# Altium PCB STM_BLUEPILL.PcbDoc
Units mm, origin at the board's own origin, x right, y up, seen from the top; angles counter-clockwise.
Board outline 53.59 x 22.48 mm, 2 copper layers (Top Layer, Bottom Layer); 30 components, 49 nets, 163 pads, 50 vias.
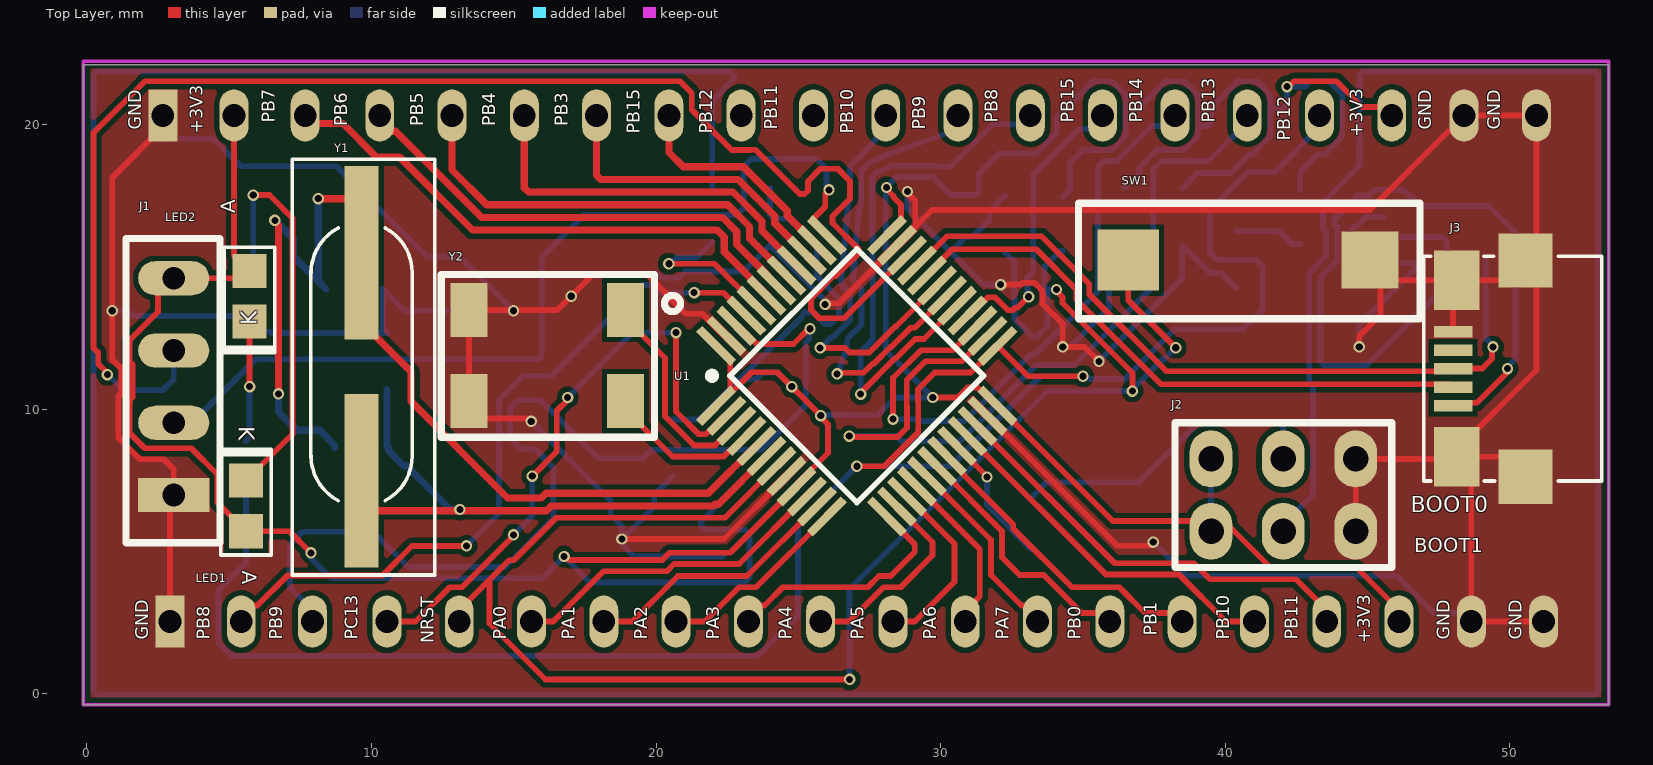
[diagram p0: Top Layer view]
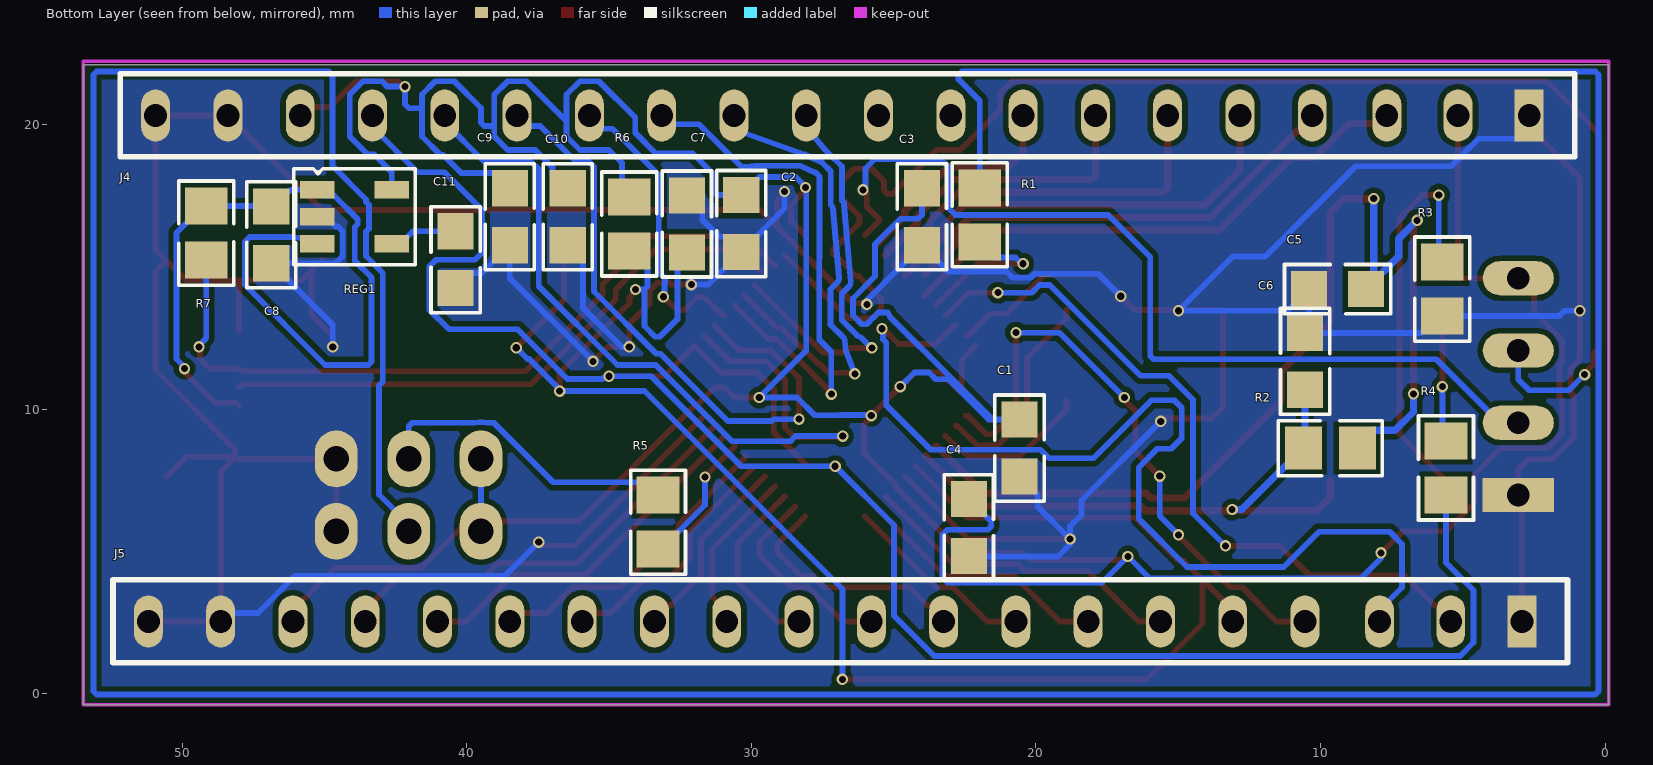
[diagram p1: Bottom Layer view, seen from below]
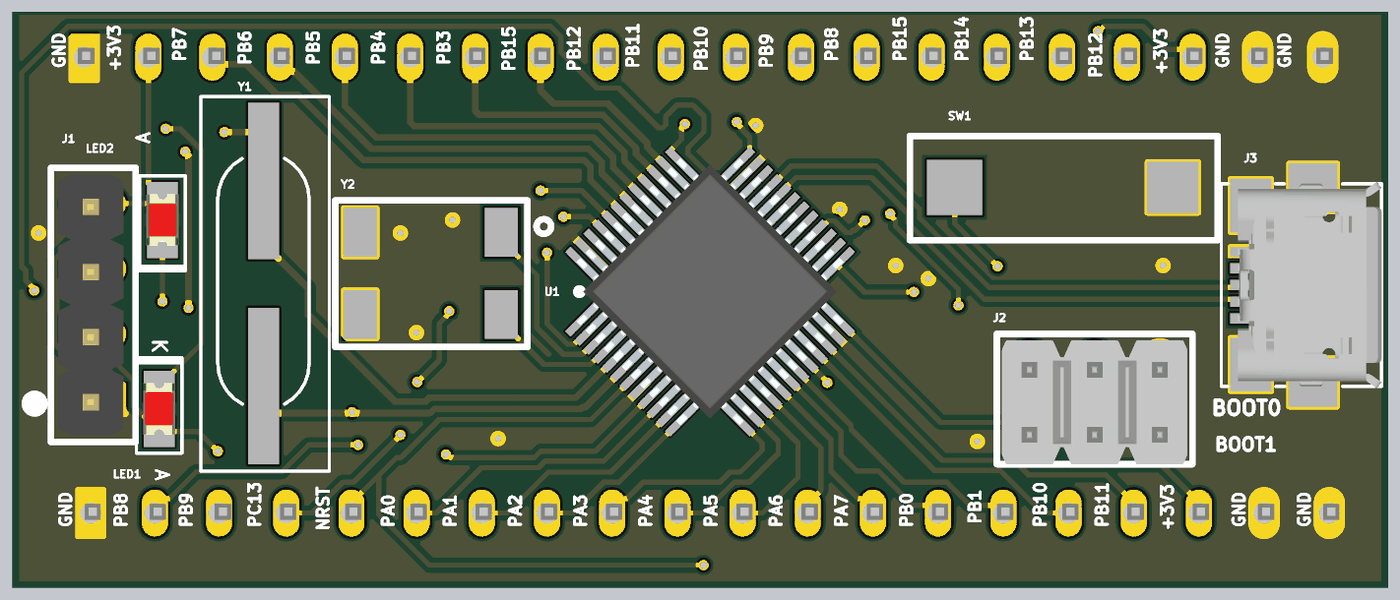
[diagram p2: 3D render of the assembled board from above, using the file's embedded part models]
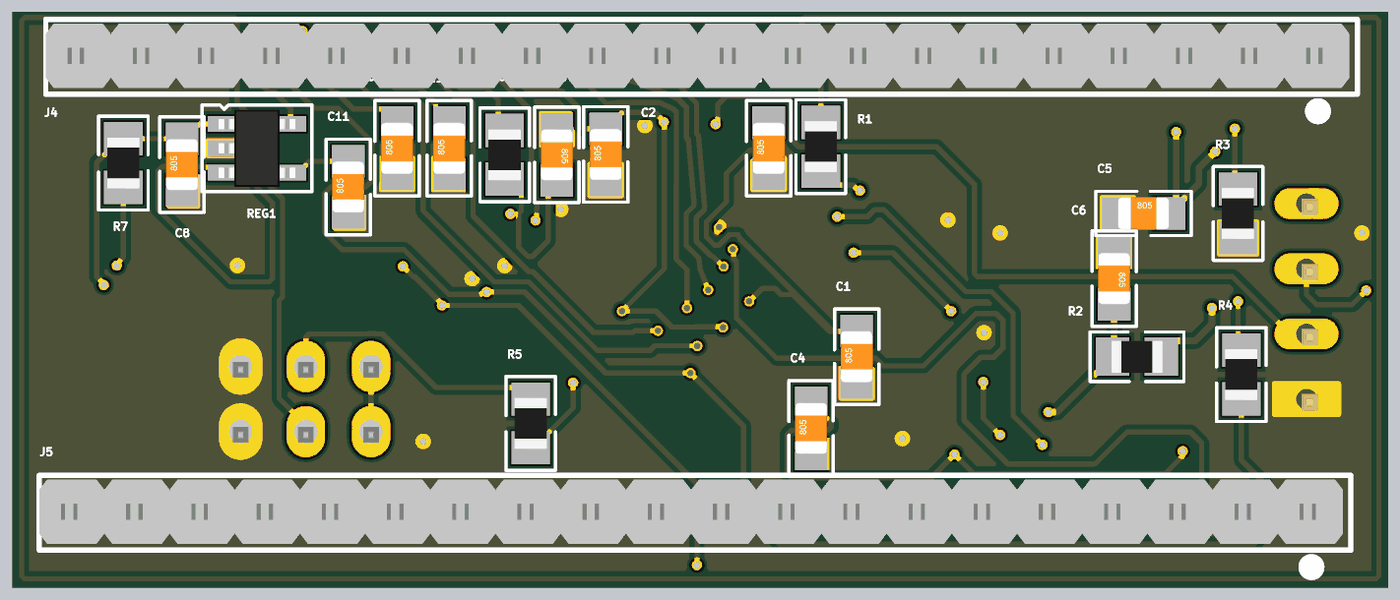
[diagram p3: 3D render of the assembled board from below, using the file's embedded part models]

## Layer stack, top to bottom
Top Solder: solder mask 0.0102, Solder Resist, Dk 3.5
Top Layer: signal copper 0.0356
Dielectric 1: dielectric 0.32, FR-4, Dk 4.8
Bottom Layer: signal copper 0.0356
Bottom Solder: solder mask 0.0102, Solder Resist, Dk 3.5

## Board outline
-0.127,-0.381 53.467,-0.381 53.467,22.098 -0.127,22.098

## Design rules (kind name [scope] priority, off if disabled: settings)
Clearance [All] p1: gap=0.19 ignorepadtopadclearanceinfootprint=FALSE
DiffPairsRouting DiffPairsRouting_2 [InDifferentialPair ('D')] p1: maxlimit=0.254 minlimit=0.254 mostfreqgap=0.254 toplayer_minwidth=0.381 toplayer_maxwidth=0.381 toplayer_prefwidth=0.381 bottomlayer_minwidth=0.381 bottomlayer_maxwidth=0.381 bottomlayer_prefwidth=0.381 maxuncoupledlength=12.7
DiffPairsRouting DiffPairsRouting_1 [InDifferentialPair ('D')] p2: maxlimit=0.254 minlimit=0.254 mostfreqgap=0.254 toplayer_minwidth=0.381 toplayer_maxwidth=0.381 toplayer_prefwidth=0.381 bottomlayer_minwidth=0.381 bottomlayer_maxwidth=0.381 bottomlayer_prefwidth=0.381 maxuncoupledlength=12.7
DiffPairsRouting DiffPair_90DiffPairsRouting [InDifferentialPairClass('diff_90')] p3: maxlimit=0.254 minlimit=0.203 mostfreqgap=0.254 toplayer_minwidth=0.203 toplayer_maxwidth=0.203 toplayer_prefwidth=0.203 bottomlayer_minwidth=0.203 bottomlayer_maxwidth=0.203 bottomlayer_prefwidth=0.203 maxuncoupledlength=12.7
DiffPairsRouting [All] p4: maxlimit=0.254 minlimit=0.254 mostfreqgap=0.254 toplayer_minwidth=0.381 toplayer_maxwidth=0.381 toplayer_prefwidth=0.381 bottomlayer_minwidth=0.381 bottomlayer_maxwidth=0.381 bottomlayer_prefwidth=0.381 maxuncoupledlength=12.7
MatchedLengths MatchedLengths_1 [InDifferentialPair ('D')] p1: tolerance=25.4 checknetsindiffpair=FALSE checkdiffpairvsdiffpair=TRUE checkxsignals=TRUE checkothers=TRUE
MatchedLengths [InDifferentialPair ('D')] p2: tolerance=25.4 checknetsindiffpair=FALSE checkdiffpairvsdiffpair=TRUE checkxsignals=TRUE checkothers=TRUE
MatchedLengths DiffPair_90MatchedLengths [InDifferentialPairClass('diff_90')] p3: tolerance=25.4 checknetsindiffpair=FALSE checkdiffpairvsdiffpair=TRUE checkxsignals=TRUE checkothers=TRUE
MinimumSolderMaskSliver [All] p1: minsoldermaskwidth=0.01
PolygonConnect [All] p1: connectstyle=Direct reliefconductorwidth=0.254 reliefentries=4 polygonreliefangle="90 Angle" airgapwidth=0.254
RoutingVias [All] p1: holewidth=0.45 width=0.9 viastyle="Through Hole" minholewidth=0.25 minwidth=0.4 maxholewidth=0.711 maxwidth=1.27
SilkToSolderMaskClearance [IsPad] p1: minsilkscreentomaskgap=0.01 clearancetoexposedcopper=TRUE
SolderMaskExpansion [All] p1: expansion=0.102 istentingtop=FALSE
Width Width_1 [All] p1: maxlimit=0.254 minlimit=0.2 preferedwidth=0.254
Width [All] p2: maxlimit=0.254 minlimit=0.15 preferedwidth=0.254
27 further rules are at their usual default settings.

## Classes and differential pairs
differential pair class diff_90: D NewDifferentialPair1
component class "[2]- Connector_Page": C8 C9 C10 C11 J3 J4 J5 R7 REG1
component class [1]-Controller_Page: C1 C2 C3 C4 C5 C6 C7 J1 J2 LED1 LED2 R1 R2 R3 R4 R5 R6 U1 Y1 Y2
differential pair NewDifferentialPair1: +D_N -D_P

## Components (designator, comment, footprint, x,y, rotation, side; value= is the part's Value field where it differs from the comment)
C1 "0.1uF" CAP_0805 20.574,8.636 r90 bottom
C2 "0.1uF" CAP_0805 30.353,16.526 r90 bottom
C3 "0.1uF" CAP_0805 24.003,16.764 r90 bottom
C4 "0.1uF" CAP_0805 22.352,5.842 r90 bottom
C5 "22pF" CAP_0805 9.398,14.224 r180 bottom
C6 "22pF" CAP_0805 10.541,11.684 r270 bottom
C7 "0.1uF" CAP_0805 32.258,16.51 r270 bottom
C8 "0.1uF" CAP_0805 46.863,16.129 r90 bottom
C9 "0.1uF" CAP_0805 38.481,16.764 r90 bottom
C10 "1uF" CAP_0805 36.449,16.764 r90 bottom
C11 "22pF" CAP_0805 40.386,15.256 r90 bottom
J1 "4X1 Bergstrip" CON4_100_40D72_TH_ST_MALE 3.048,6.985 r180 top
J2 "2X3 Berg Strip" CON6_100_59D78_TH_ST_Duplicate 39.497,5.715 r0 top
J3 "MICRO USB2.0" CON_10118192-0001LF_SMD 49.276,11.43 r90 top
J4 "20X1 Bergstrip" CON20_100_40D72_TH_ST 2.667,20.32 r270 bottom locked
J5 "20X1 Bergstrip" CON20_100_40D72_TH_ST 2.921,2.54 r270 bottom
LED1 "RED LED" LED_0805 5.588,6.604 r270 top
LED2 "RED LED" LED_0805 5.715,13.97 r90 top
R1 "10K" RES_0805 21.971,16.83 r270 bottom
R2 "10Mohm" RES_0805 9.652,8.636 r180 bottom
R3 "1K" RES_0805 5.715,14.224 r270 bottom
R4 "1K" RES_0805 5.588,7.94 r270 bottom
R5 "10K" RES_0805 33.274,6.035 r270 bottom
R6 "10K" RES_0805 34.29,16.51 r270 bottom
R7 "10K" RES_0805 49.149,16.19 r90 bottom
REG1 "RT9193-33GB" SOT23-5 43.942,16.764 r270 bottom
SW1 "TACT SWITCH" SW_342_SMD 45.085,15.24 r0 top
U1 "STM32F103C8T6" LQFP-48_19.6_393_58X11_SMD 27.051,11.176 r45 top locked
Y1 "8MHz" XTAL_314_240X47_SMD 9.652,15.494 r270 top locked
Y2 "32.768KHz" "XTAL_MC-405 32.7680K-G3" 18.923,10.287 r180 top

## Footprints (in the part's own frame and the unit in brackets; to place one, negate y for a bottom-side part, rotate by r counter-clockwise, add the part's x,y. Pads: shape width x height; smd on the part's side, far side on the other; paste and mask are expansions set on the pad)
CAP_0805 [mm] "Ceramic Capacitor"
  rect 1.27x1.27 smd mask+0.076: 1(-1,0) 2(1,0)
  silkscreen extent -1.86,-0.86 1.86,0.86, body extent -1,-0.62 1,0.63, height 0.78
CON4_100_40D72_TH_ST_MALE [mm] "Berg Strip"
  rect 2.5x1.2 hole 0.8: 1(0,0)
  oval 2.5x1.2 hole 0.8: 2(0,-2.54) 3(0,-5.08) 4(0,-7.62)
  round 1.016 on Top Overlay: ""(2.311,0.178)
  silkscreen extent -1.63,-9.02 1.68,1.68, body extent -1.14,-8.76 1.4,1.4, height 8.55
CON6_100_59D78_TH_ST_Duplicate [mm] "Berg strip"
  oval 1.5x2 hole 0.9: 1(0,0) 2(0,2.54) 3(2.54,0) 4(2.54,2.54) 5(5.08,0) 6(5.08,2.54)
  silkscreen extent -1.27,-1.27 6.35,3.81, body extent -1.07,-1.27 6.15,3.56, height 8.18
CON20_100_40D72_TH_ST [mil] "Berg strip"
  rect 72x40 hole 31.5: 1(0,0)
  oval 72x40 hole 31.5: 2(0,-98.43) 3(0,-196.85) 4(0,-300) 5(0,-400) 6(0,-500) 7(0,-600) 8(0,-700) 9(0,-800) 10(0,-900) 11(0,-1000) 12(0,-1100) 13(0,-1200) 14(0,-1300) 15(0,-1400) 16(0,-1500) 17(0,-1600) 18(0,-1700) 19(0,-1800) 20(0,-1900)
  round 40 on Bottom Overlay: ""(83,2.57)
  silkscreen extent -58,-1949 57,63, body extent -51,-1949 47,51, height 323
CON_10118192-0001LF_SMD [mm] "USB2.0 MICRO"
  rect 0.4x1.35 smd: 1(-1.3,1.275) 2(-0.65,1.275) 3(0,1.275) 4(0.65,1.275) 5(1.3,1.275)
  rect 2.1x1.6 smd: 6(-3.1,1.15) 7(3.1,1.15)
  rect 1.9x1.9 smd: 8(-3.8,-1.275) 9(3.8,-1.275)
  silkscreen extent -3.95,-3.94 3.95,2.3, body extent -4.04,-3.94 4.04,1.66, height 2.81
LED_0805 [mm] "LED"
  rect 1.2x1.2 smd mask+0.076: A(0.889,0) K(-0.889,0)
  silkscreen extent -1.99,-0.89 1.73,0.89, body extent -1.01,-0.62 1.01,0.63, height 1.1
LQFP-48_19.6_393_58X11_SMD [mm] "48LQFP"
  rect 1.7x0.3 smd mask+0.076: 1(-4.238,2.75) 2(-4.238,2.25) 3(-4.238,1.75) 4(-4.238,1.25) 5(-4.238,0.75) 6(-4.238,0.25) 7(-4.238,-0.25) 8(-4.238,-0.75) 9(-4.238,-1.25) 10(-4.238,-1.75) 11(-4.238,-2.25) 12(-4.238,-2.75) 25(4.238,-2.75) 26(4.238,-2.25) 27(4.238,-1.75) 28(4.238,-1.25) 29(4.238,-0.75) 30(4.238,-0.25) 31(4.238,0.25) 32(4.238,0.75) 33(4.238,1.25) 34(4.238,1.75) 35(4.238,2.25) 36(4.238,2.75)
  rect 0.3x1.7 smd mask+0.076: 13(-2.75,-4.238) 14(-2.25,-4.238) 15(-1.75,-4.238) 16(-1.25,-4.238) 17(-0.75,-4.238) 18(-0.25,-4.238) 19(0.25,-4.238) 20(0.75,-4.238) 21(1.25,-4.238) 22(1.75,-4.238) 23(2.25,-4.238) 24(2.75,-4.238) 37(2.75,4.238) 38(2.25,4.238) 39(1.75,4.238) 40(1.25,4.238) 41(0.75,4.238) 42(0.25,4.238) 43(-0.25,4.238) 44(-0.75,4.238) 45(-1.25,4.238) 46(-1.75,4.238) 47(-2.25,4.238) 48(-2.75,4.238)
  silkscreen extent -3.72,-3.15 3.15,3.72, body extent -4.5,-4.5 4.5,4.5, height 1.7
RES_0805 [mm] "Resister"
  rect 1.3x1.5 smd mask+0.076: 1(0.95,0) 2(-0.95,0)
  silkscreen extent -1.83,-0.97 1.83,0.97, body extent -1,-0.63 1,0.62, height 0.5
SOT23-5 [mm] "CASE: SOT"
  rect 0.62x1.22 smd mask+0.076: 1(-0.953,-1.31) 2(-0.003,-1.31) 3(0.947,-1.31) 4(0.952,1.31) 5(-0.953,1.31)
  silkscreen extent -1.69,-2.14 1.69,2.14, body extent -1.5,-1.5 1.5,1.5, height 1.41
SW_342_SMD [mm] "CASE: SMD"
  rect 2x2 smd: 1(0,0)
  rect 2.15x2.15 smd: 2(-8.5,0)
  silkscreen extent -10.25,-2.06 1.75,2, body extent -7.17,-1.79 -1.17,1.71, height 2.4
XTAL_314_240X47_SMD [mm] "CASE: TH"
  rect 6.096x1.2 smd: 1(0,0) 2(8,0)
  silkscreen extent -3.29,-2.44 11.32,2.57, body extent -2.99,-2.27 10.9,2.41, height 3.05
"XTAL_MC-405 32.7680K-G3" [mm] "Crystal"
  rect 1.3x1.9 smd: 1(0,-3.2) 2(5.5,-3.2) 3(5.5,0) 4(0,0)
  silkscreen extent -1.93,-4.44 6.48,1.27, body extent -1.02,-4.44 6.48,1.27, height 3.6

## Part data
C1 C2 C3 C4 C7 C8 C9: library part CAP_0.1uF-50V-5%-0805, "0.1µF ±5% 50V Ceramic Capacitor X7R 0805 (2012 Metric)", Case/Package="0805 (2012 Metric)", Manufacturer=KEMET, Manufacturing Part Number=C0805C104J5RACTU, Supplier Part Number-1=399-1171-1-ND, Supplier-1=Digikey
C5 C6 C11: library part CAP_22pF-50V-5%-0805, "22pF ±5% 50V Ceramic Capacitor C0G, NP0 0805 (2012 Metric)", Case/Package=0805, Manufacturer=KEMET, Manufacturer Part Number=C0805C220J5GACTU, Supplier Part Number-1=399-1113-1-ND, Supplier-1=Digikey
C10: library part CAP_1uF-50V-5%-0805, "1µF ±5% 50V Ceramic Capacitor X7R 0805 (2012 Metric)", Case/Package="0805 (2012 Metric)", Manufacturer=Yageo, Manufacturing Part Number=CC0805JKX7R9BB105, Supplier Part Number-1=311-3498-1-ND, Supplier-1=Digikey
J1: library part CON-BS-PLG_4X1-100-TH-ST, "4 pin, 1 row, 2.54mm pitch bergstrip", Case/Package=TH, Manufacturer=NA, Manufacturing Part Number=NA, Supplier Part Number-1=NA, Supplier-1=NA
J2: library part CON-BS-PLG_2X3-100-TH-ST, "6 pin, 2 row, 2.54mm pitch bergstrip", Case/Package=TH, Manufacturer=NA, Manufacturer Part Number=NA, Supplier Part Number-1=NA, Supplier-1=NA
J3: library part CON-USB_10118192-0002LF-SMD, "USB - micro B USB 2.0 Receptacle Connector 5 Position Surface Mount, Right Angle", Case/Package=SMD, Manufacturer="Amphenol ICC (FCI)", Manufacturing Part Number=10118192-0002LF, Supplier Part Number-1=609-5379-1-ND, Supplier-1=Digikey
J4 J5: library part CON-BS-PLG_20X1-100-TH-ST, "20 pin, 1 row, 2.54mm pitch bergstrip", Case/Package=TH, Manufacturer=NA, Manufacturing Part Number=NA, Supplier Part Number-1=NA, Supplier-1=NA
LED1 LED2: library part LED-RED_10mA-0805, "Red 621nm LED Indication - Discrete 2V 0805 (2012 Metric)", Case/ Package=0805, Manufacturer="Lite-On Inc.", Manufacturer Part Number=LTST-C170EKT, Supplier Part Number-1=160-1178-1-ND, Supplier-1=Digikey
R1 R5 R6 R7: library part RES_10K-0.125W-1%-0805, "10 kOhms ±1% 0.125W, 1/8W Chip Resistor 0805 (2012 Metric) Moisture Resistant Thick Film", Case/Package=0805, Manufacturer=Yageo, Manufacturing Part Number=RC0805FR-0710KL, Supplier Part Number-1=311-10.0KCRCT-ND, Supplier-1=Digikey
R2: library part RES_10MOHM-0.125W-1%-0805, "10 MOhms ±1% 0.125W, 1/8W Chip Resistor 0805 (2012 Metric) Automotive AEC-Q200, High Voltage Thick Film", Case/Package="0805 (2012 Metric)", Manufacturer="Rohm Semiconductor", Manufacturing Part Number=KTR10EZPF1005, Supplier Part Number-1=RHM10.0MAHCT-ND, Supplier-1=Digikey
R3 R4: library part RES_1K-0.125W-1%-0805, "1 kOhms ±1% 0.125W, 1/8W Chip Resistor 0805 (2012 Metric) Moisture Resistant Thick Film", Case/Package=0805, Manufacturer=垈㎵á, Manufacturer Part Number=RC0805FR-071KL, Supplier Part Number-1=311-1.00KCRCT-ND, Supplier-1=Digikey
REG1: library part REG_3.3V-5.5V-0.3A-SOT-23-5, "Linear Voltage Regulator IC 1 Output 300mA SOT-23-5", Case/ Package=SOT-23-5, Manufacturer="Richtek USA Inc.", Supplier Part Number-1=1028-1014-1-ND, Manufacturer Part Number=RT9193-33GB, Supplier-1=Digikey
SW1: library part SW_KSR223GLFG-SMD, "Tactile Switch SPST-NO Top Actuated Surface Mount", Case/Package=SMD, Manufacturer=C&K, Manufacturing Part Number=KSR223GLFG, Supplier Part Number-1=401-1704-1-ND, Supplier-1=Digikey
U1: library part "IC-STM32F103C8T6 _1", "ARM® Cortex®-M3 STM32F1 Microcontroller IC 32-Bit 72MHz 64KB (64K x 8) FLASH", Case/Package=48-LQFP, Manufacturer=STMicroelectronics, Supplier Part Number-1=497-6063-ND, Manufacturer Part Number=STM32F103C8T6, Supplier-1=Digikey
Y1: library part XTAL_8MHZ-LFXTAL030234, "Crystals 8MHz 22pF -20C 70C", Case/Package=SMD, Manufacturer="IQD Frequency Products", Manufacturing Part Number=LFXTAL030234Reel, Supplier Part Number-1=449-LFXTAL030234REEL, Supplier-1=Mouser
Y2: library part "XTAL_32.768KHz-MC-405 32.7680K-G3", "Crystals SMD AT XTL MHZ +/-50PPM 12.5 PF 250 T/R", Case/Package=SMD, Manufacturer=Epson, Manufacturing Part Number="MC-405 32.7680K-G3: ROHS", Supplier Part Number-1=732-MC405327680KG3RS, Supplier-1=Mouser

## Via types
v1: diameter 0.4, hole 0.25, Top Layer to Bottom Layer, 50 vias

## Nets (pads, with @x,y where several pads share a name; then routed paths per layer and width w, separated by ;. In a path a pad name is that pad's centre, name@x,y a point inside that pad or via, vN(x,y) a via of type N, cw(c..) or ccw(c..) an arc to the next point about the centre after c; other vN are vias at no path point)
+3V3: C1.2 C2.2 C3.2 C4.2 C9.2 C10.2 J1.4 J2.1 J2.2 J4.2 J4.18 J5.18 LED1.A LED2.A R6.2 REG1.5 U1.1 U1.9 U1.24 U1.36 U1.48 | length 163.9
  Top Layer w0.203: J4.2 5.167,15.407 LED2.A 5.461,14.605 J1.4 2.96,14.605 2.5,14.145 2.5,13.428 1.506,12.434 1.506,11.683 1.604,11.585 1.604,10.419 1.506,10.321 1.506,9.156 2.029,8.633 3.662,8.633 4.59,7.706 4.59,6.713 LED1.A 7.112,5.715 v1(7.874,4.953) ; v1(16.764,4.826) 16.817,4.826 16.941,4.702 20.214,4.702 20.468,4.956 22.599,4.956 U1.9 24.938,7.364 26.035,8.461 26.035,9.472 25.781,9.726 v1(25.781,9.779) 24.257,11.303 23.357,11.303 U1.1@22.639,10.585 ; U1.1 22.605,10.619 22.605,11.733 U1.48 ; v1(28.092,17.79) 28.092,17.737 28.337,17.491 28.337,17.449 28.598,17.189 28.598,16.612 U1.36 ; v1(29.718,10.414) 30.583,10.414 30.938,10.769 31.279,10.769 31.924,10.124 U1.24 36.041,6.076 39.953,6.076 41.606,4.423 44.624,4.423 46.101,2.946 J5.18 ; v1(42.164,21.336) 42.217,21.336 42.407,21.526 43.902,21.526 44.803,20.625 45.542,20.625 J4.18
  Bottom Layer w0.203: v1(7.874,4.953) 7.874,4.767 8.577,4.064 16.002,4.064 v1(16.764,4.826) 17.674,3.916 23.108,3.916 23.279,4.086 23.279,5.598 23.108,5.769 21.685,5.769 21.566,5.888 21.566,6.056 C4.2 ; C1.2 21.514,9.636 ; C3.2 24.003,16.824 24.137,16.691 24.759,16.691 24.87,16.579 25.649,15.8 25.649,14.674 26.428,13.895 26.428,13.299 26.119,12.99 25.945,12.99 25.711,13.224 25.704,13.224 25.526,13.402 25.205,13.402 25.129,13.251 23.003,11.125 21.582,9.705 21.514,9.636 ; v1(24.765,10.795) 24.266,11.294 23.752,11.294 23.514,11.056 23.071,11.056 21.651,9.636 21.514,9.636 ; v1(25.781,9.779) 25.801,9.799 26.873,9.799 26.879,9.793 27.767,9.793 28.388,10.414 v1(29.718,10.414) 28.067,12.065 28.067,17.765 v1(28.092,17.79) ; v1@28.067,17.79 28.438,18.161 29.718,18.161 29.778,18.101 C2.2 31.212,17.526 31.331,17.645 31.331,18.266 32.055,18.99 33.354,18.99 34.078,19.714 34.078,20.248 35.356,21.526 36.018,21.526 36.487,21.058 36.487,20.117 ; R6.2 34.545,17.715 34.545,18.655 35.005,19.114 36.018,19.114 36.487,19.582 36.487,20.117 ; C10.2 36.983,18.297 36.983,18.504 37.593,19.114 38.558,19.114 39.027,19.582 39.027,19.951 ; C9.2 39.015,18.297 40.189,18.297 40.832,18.94 40.924,18.94 41.567,19.582 41.567,20.574 ; J2.1 J2.2 ; REG1.5 42.632,18.331 43.258,18.957 43.481,18.957 44.107,19.582 44.107,21.058 43.638,21.526 42.976,21.526 42.786,21.336 v1(42.164,21.336) 42.164,20.714 42.024,20.574 41.567,20.574 ; 36.487,20.117 37.896,21.526 38.558,21.526 39.027,21.058 39.027,19.951 ; 39.027,19.951 39.378,19.951 39.497,20.07 39.497,20.587 40.436,21.526 41.098,21.526 41.567,21.058 41.567,20.574
+5V: C8.2 J3.1 R7.1 REG1.1 REG1.3 | length 30
  Top Layer w0.203: J3.1 48.099,10.228 48.836,10.228 49.911,11.303 v1(49.911,11.43)
  Bottom Layer w0.203: REG1.3 45.46,16.025 46.077,16.025 46.107,16.056 47.619,16.056 47.79,15.885 47.79,14.373 44.973,11.557 43.456,11.557 43.337,11.676 43.337,14.628 43.927,15.218 43.927,16.405 43.827,16.505 43.827,16.674 44.661,17.508 45.044,17.508 REG1.1 46.167,17.717 46.221,17.662 46.33,17.662 C8.2 46.874,17.14 R7.1 49.249,17.14 50.191,16.198 50.191,11.763 49.911,11.483 v1(49.911,11.43)
BOOT0: J2.3 R1.2 | length 149
  Bottom Layer w0.203: R1.2 21.971,20.841 22.712,21.583 22.712,21.751 22.593,21.87 0.347,21.87 0.228,21.751 0.228,0.093 0.347,-0.026 52.993,-0.026 53.112,0.093 53.112,21.751 52.993,21.87 44.836,21.87 44.717,21.751 44.717,18.555 43.534,17.372 43.534,17.286 43.434,17.186 43.434,16.342 43.534,16.242 43.534,15.381 42.944,14.791 42.944,10.966 43.079,10.832 43.079,7.007 42.037,5.965 J2.3
BOOT1: J2.4 R5.2 | length 17.2
  Bottom Layer w0.203: R5.2 33.727,7.438 36.957,7.438 39.044,9.525 ; J2.4 42.037,9.406 41.918,9.525 ; 39.044,9.525 39.286,9.525 ; 39.044,9.525 39.286,9.525 ; 39.044,9.525 39.286,9.525 ; 39.286,9.525 cw(c39.497,8.505) 39.708,9.525 ; 39.286,9.525 cw(c39.497,8.505) 39.708,9.525 ; 39.286,9.525 cw(c39.497,8.505) 39.708,9.525 ; 39.286,9.525 cw(c39.497,8.505) 39.708,9.525 ; 39.708,9.525 41.918,9.525 ; 39.708,9.525 41.918,9.525 ; 39.708,9.525 41.918,9.525
D_N: J3.2 U1.32 | length 21.1
  Top Layer w0.203: U1.32 29.517,14.733 30.405,15.621 33.352,15.621 34.761,14.212 34.761,13.855 37.74,10.876 47.905,10.876 J3.2
D_P: J3.3 R7.2 U1.33 | length 26.6
  Top Layer w0.203: U1.33 29.194,15.057 30.216,16.078 33.541,16.078 35.218,14.401 35.218,14.044 37.929,11.334 47.905,11.334 J3.3 49.022,11.43 49.365,11.773 49.365,12.154 v1(49.403,12.192)
  Bottom Layer w0.203: R7.2 49.149,12.499 49.403,12.245 v1(49.403,12.192)
GND: C1.1 C2.1 C3.1 C4.1 C5.1 C6.1 C7.1 C8.1 C9.1 C10.1 C11.1 J1.1 J2.5 J2.6 J3.5 J3.6 J3.7 J3.8 J3.9 J4.1 J4.19 J4.20 J5.1 J5.19 J5.20 R3.1 REG1.2 SW1.1 U1.8 U1.23 U1.35 U1.47 Y2.2 Y2.3 | length 223.4
  Top Layer w0.203: J4.1 2.667,19.914 0.889,18.136 0.889,11.744 1.211,11.422 1.211,10.582 1.113,10.484 1.113,8.993 1.866,8.24 2.698,8.24 3.048,7.89 J1.1 2.921,6.858 J5.1 ; v1(15.613,9.576) 15.509,9.68 13.817,9.68 13.423,10.073 Y2.3 Y2.2 16.523,13.487 17.765,14.729 19.694,14.729 20.361,14.061 20.361,14.023 21.029,13.355 21.621,13.355 22.395,12.582 U1.47 ; v1(18.796,5.444) 22.379,5.444 U1.8 ; v1(25.937,13.687) 25.974,13.725 26.418,13.725 U1.35 28.457,15.768 29.102,16.413 ; v1(28.829,17.653) 28.829,17.6 29.102,17.327 29.102,16.413 ; U1.23 36.202,5.207 37.338,5.207 v1(37.465,5.334) ; v1(32.104,14.382) 32.82,14.382 32.883,14.446 33.291,14.446 33.578,14.158 33.578,13.709 34.284,13.004 v1(34.284,12.192) 35.052,12.192 v1(35.56,11.684) ; J2.5 J2.6 48.051,8.255 J3.6 ; v1(44.704,12.192) 44.704,12.573 45.45,13.319 SW1.1@45.45,14.875 ; SW1.1 SW1.1@45.45,14.875 ; J3.5 48.001,14.405 J3.7 ; J3.8 49.851,8.33 J3.6 ; J5.20 J5.19 48.641,7.815 J3.6 ; 29.102,16.413 29.695,17.006 45.073,17.006 47.825,19.758 48.012,19.758 48.387,20.134 J4.19 J4.20 50.927,15.606 J3.9 ; SW1.1@45.45,14.875 45.795,14.53 J3.7 ; J3.6 48.126,8.58 50.927,11.381 50.927,14.854 J3.9 ; J3.7 49.851,14.53 J3.9
  Bottom Layer w0.203: v1(0.889,13.462) 1.418,13.462 1.606,13.274 R3.1 6.263,12.726 6.441,12.726 6.482,12.684 C6.1 10.398,12.827 C5.1 11.16,13.462 v1(14.986,13.462) 13.081,15.367 11.938,15.367 8.763,18.542 5.408,18.542 4.443,19.507 3.073,19.507 2.667,19.914 J4.1 ; v1(15.613,9.576) 18.393,6.795 18.393,6.289 18.796,5.886 v1(18.796,5.444) ; v1(17.018,13.97) 17.81,14.762 20.036,14.762 20.177,14.621 20.812,14.621 21.029,14.839 23.078,14.839 C3.1 25.899,13.868 25.899,13.725 v1(25.937,13.687) ; C1.1 19.931,6.993 19.931,6.579 v1(18.796,5.444) ; C4.1 22.336,4.826 19.225,4.826 18.796,5.255 v1(18.796,5.444) ; v1(28.829,17.653) 28.829,17.05 C2.1 ; v1(32.104,14.382) 31.497,14.382 C2.1 ; C7.1 31.724,16.976 31.724,16.659 31.125,16.059 30.886,16.059 C2.1 ; v1(34.284,12.192) 34.544,12.192 35.916,13.564 35.916,15.231 C10.1 ; v1(35.56,11.684) 38.481,14.605 C9.1 39.456,14.789 39.853,14.789 C11.1 ; v1(37.465,5.334) 38.648,4.151 46.027,4.151 47.333,2.845 48.336,2.845 J5.19 ; v1(44.704,12.192) 44.704,12.97 C8.1 44.607,15.129 44.35,15.386 44.35,16.247 44.521,16.418 44.604,16.418 44.952,16.767 REG1.2 REG1.2@45.552,16.767
NetC11_2: C11.2 REG1.4 | length 2.4
  Bottom Layer w0.203: C11.2 41.888,16.256 42.332,15.812 REG1.4
NetLED1_K: LED1.K R3.2 | length 14
  Top Layer w0.203: LED1.K 7.223,9.128 7.223,16.714 6.41,17.526 v1(5.842,17.526)
  Bottom Layer w0.203: R3.2 5.842,15.301 v1(5.842,17.526)
NetLED2_K: LED2.K R4.2 | length 4.2
  Top Layer w0.203: v1(5.715,10.795) 5.715,11.562 LED2.K
  Bottom Layer w0.203: R4.2 5.715,9.017 v1(5.715,10.795)
NetR1_1: R1.1 U1.44 | length 5.5
  Top Layer w0.203: v1(20.447,15.113) 22.053,15.113 U1.44
  Bottom Layer w0.203: v1(20.447,15.113) 20.5,15.113 20.719,15.332 21.423,15.332 R1.1
NetR5_1: R5.1 U1.20 | length 4.8
  Top Layer w0.203: U1.20 30.578,8.687 31.623,7.642 v1(31.623,7.62)
  Bottom Layer w0.203: v1(31.623,7.62) 31.623,6.636 33.174,5.085 R5.1
NRST: C7.2 J5.5 R6.1 SW1.2 U1.7 | length 62.6
  Top Layer w0.203: J5.5 13.081,2.946 14.833,4.699 14.999,4.699 16.486,6.185 22.414,6.185 U1.7 ; 14.148,4.013 14.148,2.476 16.116,0.508 v1(26.797,0.508) ; v1(34.067,14.21) 34.067,14.157 34.166,14.059 34.277,13.948 34.277,13.729 36.733,11.273 v1(36.733,10.638) ; SW1.2 36.585,13.834 v1(38.257,12.162)
  Bottom Layer w0.203: v1(26.797,0.508) 26.797,3.683 33.752,10.638 v1(36.733,10.638) ; C7.2 32.595,15.173 32.595,13.166 33.21,12.551 33.379,12.551 33.749,12.921 33.749,14.15 ; v1(34.067,14.21) 34.063,14.206 33.761,14.206 33.641,14.325 33.641,15.012 34.19,15.56 R6.1 ; v1@36.703,10.668 37.798,11.763 37.858,11.763 v1(38.257,12.162)
PA0: J5.6 U1.10 | length 11.5
  Top Layer w0.203: J5.6 16.383,2.54 18.152,4.309 20.377,4.309 20.631,4.563 22.913,4.563 U1.10
PA1: J5.7 U1.11 | length 9.2
  Top Layer w0.203: J5.7 19.164,2.54 20.763,4.139 23.196,4.139 U1.11
PA2: J5.8 U1.12 | length 6.8
  Top Layer w0.203: J5.8 21.704,2.54 22.91,3.746 23.51,3.746 U1.12
PA3: J5.9 U1.13 | length 8.6
  Top Layer w0.203: J5.9 23.241,2.726 23.616,3.102 23.803,3.102 24.447,3.746 27.434,3.746 27.827,4.139 28.241,4.139 29.083,4.981 29.083,5.255 U1.13
PA4: J5.10 U1.14 | length 7.1
  Top Layer w0.203: J5.10 26.784,2.54 27.99,3.746 28.59,3.746 29.711,4.867 29.711,5.334 U1.14
PA5: J5.11 U1.15 | length 6.4
  Top Layer w0.203: J5.11 29.083,2.54 30.48,3.937 30.48,5.272 U1.15
PA6: J5.12 U1.16 | length 5.9
  Top Layer w0.203: U1.16 31.369,5.09 31.369,3.42 30.861,2.912 J5.12
PA7: J5.13 U1.17 | length 6.8
  Top Layer w0.203: U1.17 31.762,5.404 31.762,4.179 32.839,3.102 33.026,3.102 33.401,2.726 J5.13
PA8: J4.13 U1.29 | length 18.9
  Top Layer w0.203: v1(27.186,10.534) 27.186,10.582 28.395,11.791 28.424,11.791 29.104,12.47 29.406,12.47 U1.29
  Bottom Layer w0.203: v1(27.186,10.534) 27.186,12.024 27.608,12.446 27.608,15.31 27.6,15.318 27.6,18.182 27.693,18.275 cw(c27.837,18.131) 27.752,18.316 28.275,18.554 29.881,18.554 30.168,18.512 30.336,18.512 31.839,20.015 32.842,20.015 J4.13
PA9: J4.12 U1.30 | length 16.7
  Top Layer w0.203: v1(26.357,11.243) 26.397,11.283 27.285,11.283 27.602,11.6 27.648,11.6 28.232,12.184 28.261,12.184 28.941,12.864 29.092,12.864 U1.30
  Bottom Layer w0.203: v1(26.357,11.243) 26.681,12.075 26.711,12.403 cw(c26.913,12.384) 26.769,12.528 27.215,12.973 27.215,14.221 26.97,14.465 cw(c27.114,14.609) 26.912,14.627 27.129,17.033 27.135,17.102 27.207,17.174 27.207,18.367 27.515,18.675 28.112,18.947 30.488,19.795 30.607,19.914 J4.12
PA10: J4.11 U1.31 | length 14.4
  Top Layer w0.203: v1(25.761,12.155) 26.636,12.155 26.798,11.993 27.485,11.993 28.399,12.907 28.428,12.907 U1.31
  Bottom Layer w0.203: v1(25.761,12.155) 25.961,12.34 26.018,12.397 26.137,12.516 26.282,12.597 26.361,12.676 26.821,13.136 26.821,14.058 26.558,14.321 ; 26.558,14.321 cw(c26.702,14.465) 26.518,14.379 26.499,14.484 26.736,17.196 26.742,17.265 26.814,17.337 26.814,18.53 27.293,19.009 27.412,19.128 28.067,19.914 J4.11
PA11: J4.10
PA12: J4.9
PA15: J4.8 U1.38 | length 7.9
  Top Layer w0.254: J4.8 20.447,19.025 20.953,18.519 23.064,18.519 24.61,16.973 24.61,16.799 U1.38
PB0: J5.14 U1.18 | length 8.9
  Top Layer w0.203: U1.18 32.155,5.718 32.155,4.802 32.778,4.179 33.619,4.179 34.953,2.845 35.636,2.845 J5.14
PB1: J5.15 U1.19 | length 10.8
  Top Layer w0.203: U1.19 30.224,8.288 30.797,7.716 30.797,7.701 32.549,5.949 32.549,5.805 34.608,3.746 36.272,3.746 37.173,2.845 38.176,2.845 J5.15
PB3: J4.7 U1.39 | length 10.8
  Top Layer w0.254: J4.7 17.907,18.223 18.056,18.075 22.88,18.075 24.166,16.789 24.166,16.536 U1.39
PB4: J4.6 U1.40 | length 13.4
  Top Layer w0.254: J4.6 15.367,17.779 15.516,17.631 22.696,17.631 23.722,16.605 23.722,16.273 U1.40
PB5: J4.5 U1.41 | length 15.4
  Top Layer w0.254: J4.5 12.827,18.408 14.048,17.187 22.512,17.187 23.278,16.421 23.278,16.01 U1.41
PB6: J4.4 U1.42 | length 16.3
  Top Layer w0.254: J4.4 10.287,20.12 10.639,19.768 10.839,19.768 13.864,16.743 22.328,16.743 22.834,16.237 22.834,15.794 U1.42@23.886,14.742
PB7: J4.3 U1.43 | length 21.3
  Top Layer w0.254: J4.3 7.946,20.041 8.993,20.041 10.175,18.859 10.986,18.859 13.546,16.299 22.144,16.299 22.39,16.053 22.39,15.53 ; 22.39,15.53 23.913,14.007 22.39,15.53
PB8: J5.2 U1.45 | length 25.5
  Top Layer w0.203: J5.2 5.421,2.726 5.796,3.102 5.983,3.102 7.035,4.154 10.373,4.154 11.417,5.199 v1(13.335,5.199) ; v1(21.336,14.097) 22.362,14.097 U1.45
  Bottom Layer w0.203: v1(13.335,5.199) 14.478,6.342 14.478,10.335 15.319,11.176 16.318,11.176 19.511,14.369 19.873,14.369 20.145,14.097 v1(21.336,14.097)
PB9: J5.3 U1.46 | length 36.4
  Top Layer w0.203: U1.46 22.885,12.935 23.531,12.29 24.823,12.29 25.363,12.831 v1(25.404,12.831)
  Bottom Layer w0.203: J5.3 7.921,2.946 7.132,3.735 7.132,5.26 7.567,5.695 10.054,5.695 11.291,4.457 14.691,4.457 16.387,6.153 16.387,7.956 15.731,8.612 15.238,8.612 14.871,8.979 14.871,10.053 15.135,10.317 15.939,10.317 17.974,8.282 19.538,8.282 19.837,8.581 23.694,8.581 25.257,10.144 25.257,12.346 25.369,12.458 25.369,12.795 v1(25.404,12.831)
PB10: J5.16 U1.21 | length 12.8
  Top Layer w0.203: U1.21 35.796,4.199 38.359,4.199 40.018,2.54 J5.16
PB11: J5.17 U1.22 | length 15.4
  Top Layer w0.203: U1.22 36.109,4.592 38.897,4.592 39.459,4.03 42.477,4.03 43.561,2.946 J5.17
PB12: J4.17 R4.1 U1.25 | length 71
  Top Layer w0.203: v1(27.051,8) 27.053,8.001 28.016,8.001 29.206,9.191 29.206,10.269 29.198,10.277 29.198,10.704 29.785,11.291 31.055,11.291 U1.25 33.061,11.16 v1(34.997,11.16)
  Bottom Layer w0.203: R4.1 5.588,4.605 4.621,3.639 4.621,1.802 5.09,1.334 23.572,1.334 24.981,2.743 24.981,5.931 27.05,8 v1(27.051,8) ; v1@27.053,8 30.352,8 33.516,11.164 34.993,11.164 v1(34.997,11.16) ; v1@35.064,11.164 35.064,11.146 35.088,11.122 35.173,11.122 35.229,11.065 36.465,11.065 38.211,12.811 40.623,12.811 41.313,13.5 41.313,15.012 41.068,15.256 39.704,15.256 39.459,15.5 39.459,17.012 40.778,18.33 41.723,18.33 43.307,19.914 J4.17
PB13: J4.16 U1.26 | length 28.7
  Top Layer w0.203: v1(26.786,9.057) 26.814,9.029 28.488,9.029 28.813,9.354 28.813,10.106 28.805,10.114 28.805,11.025 29.464,11.684 30.741,11.684 U1.26
  Bottom Layer w0.203: v1(26.786,9.057) 26.791,9.062 28.441,9.062 28.623,8.88 30.676,8.88 33.353,11.557 34.702,11.557 37.465,14.32 37.465,18.43 37.755,18.721 39.404,18.721 40.767,20.083 J4.16
PB14: J4.15 U1.27 | length 22.1
  Top Layer w0.203: v1(28.321,9.652) 28.321,11.097 29.301,12.077 30.427,12.077 U1.27
  Bottom Layer w0.203: v1(28.321,9.652) 29.217,9.652 29.284,9.585 30.824,9.585 33.19,11.95 33.334,11.95 35.523,14.138 35.523,18.52 35.723,18.721 36.181,18.721 37.414,19.954 37.861,19.954 J4.15
PB15: J4.14 U1.28 | length 10.6
  Top Layer w0.203: U1.28 31,13.289 31.572,13.861 31.586,13.861 31.659,13.934 31.901,13.934 32.358,13.477 32.527,13.477 32.615,13.565 32.696,13.565 33.084,13.954 v1(33.087,13.954)
  Bottom Layer w0.203: v1(33.087,13.954) 33.049,13.992 33.049,14.416 33.032,14.433 33.032,14.602 33.248,14.818 33.248,18.231 34.874,19.857 35.312,19.857 35.687,20.232 J4.14
PC13: J5.4 U1.2 | length 21.2
  Top Layer w0.203: J5.4 11.544,2.54 12.75,3.746 13.177,3.746 14.986,5.555 v1(14.986,5.588) ; v1(15.645,7.649) 16.51,8.514 16.51,9.947 16.891,10.328 v1(16.891,10.414) ; v1(20.697,12.692) 20.701,12.688 20.701,9.918 21.494,9.125 21.75,9.125 22.395,9.77 U1.2
  Bottom Layer w0.203: v1(14.986,5.588) 15.645,6.247 v1(15.645,7.649) ; v1(16.891,10.414) 19.169,12.692 v1(20.697,12.692)
SWCLK: J1.2 U1.37 | length 32.6
  Top Layer w0.203: U1.37 25.504,16.612 25.504,16.681 25.902,17.079 25.939,17.116 25.939,17.574 v1(26.072,17.707)
  Bottom Layer w0.203: J1.2 3.698,9.525 5.93,11.757 15.862,11.757 15.981,11.876 15.981,15.346 17.457,16.822 21.1,16.822 22.825,16.822 23.077,17.073 23.077,18.52 23.353,18.796 25.654,18.796 25.988,18.462 25.988,17.792 v1(26.072,17.707)
SWDIO: J1.3 U1.34 | length 52.8
  Top Layer w0.203: v1(0.72,11.218) 0.72,11.272 0.397,11.594 0.397,11.986 0.228,12.155 0.228,19.716 1.83,21.318 2.038,21.526 20.836,21.526 21.247,21.115 21.247,20.523 22.656,19.114 23.318,19.114 23.321,19.117 23.489,19.117 25.043,17.563 25.211,17.563 25.331,17.682 25.331,18.015 25.765,18.449 26.379,18.449 26.814,18.015 26.814,17.4 26.193,16.779 26.193,16.548 27.104,15.636 27.104,15.468 26.316,14.679 26.233,14.679 25.445,13.891 25.445,13.484 25.733,13.196 26.596,13.196 U1.34
  Bottom Layer w0.203: v1(0.72,11.218) 1.27,10.668 2.667,10.668 3.048,11.049 J1.3
XTALA: C5.2 R2.1 U1.5 Y1.1 | length 39.2
  Top Layer w0.254: v1(6.604,16.637) 6.604,16.597 6.731,16.47 v1(6.731,10.541) ; v1(8.128,17.399) 9.179,17.399 9.652,16.926 Y1.1 9.652,13.046 11.383,11.315 11.383,10.278 14.78,6.882 15.963,6.882 16.129,7.048 21.83,7.048 23.491,8.71 U1.5
  Bottom Layer w0.254: v1(6.604,16.637) 7.247,15.994 7.247,15.375 C5.2 8.128,14.494 v1(8.128,17.399) ; v1(6.731,10.541) 6.731,9.906 7.378,9.259 8.179,9.259 8.702,8.736 R2.1
XTALB: C6.2 R2.2 U1.6 Y1.2 | length 21.3
  Top Layer w0.254: Y1.2 9.652,6.911 10.125,6.438 16.147,6.438 16.213,6.504 16.313,6.604 22.014,6.604 22.075,6.666 22.187,6.666 U1.6
  Bottom Layer w0.254: C6.2 10.541,8.697 R2.2 10.602,8.536 11.125,8.013 11.225,8.013 12.761,6.477 v1(13.103,6.477)
XTALC: U1.3 Y2.1 | length 7.5
  Top Layer w0.203: Y2.1 18.923,13.187 20.308,11.802 20.308,9.755 21.331,8.732 22.049,8.732 22.064,8.732 22.748,9.417 U1.3
XTALD: U1.4 Y2.4 | length 5.5
  Top Layer w0.203: Y2.4 18.923,9.987 20.571,8.339 22.378,8.339 22.607,8.568 22.675,8.568 U1.4
pads on no net: J1. J3.4 J4. J5.

## Polygon pours and split planes (outlines as drawn)
GND on Bottom Layer "GND_L02_P003" (solid, remove dead copper, pour order 3): 0.228,21.751 0.228,0.093 53.112,0.093 53.112,21.751 52.993,21.87
GND on Top Layer "GND_L01_P000" (solid, remove dead copper, pour order 0): 0,22.098 -0.127,21.971 -0.127,-0.254 53.34,-0.254 53.467,-0.127 53.213,0.127 53.213,21.971

## Keep-outs
Keep-Out Layer:
  lines w0.127: -0.127,-0.381 -0.127,22.225 53.467,22.225 53.467,-0.381 -0.127,-0.381

## Silkscreen, mask and mechanical layers (free items; w line width, h text height)
Top Overlay:
  text "PB7" at 6.601,20.069 h0.45 r90
  text "PB8" at 32.001,20.069 h0.45 r90
  text "PB15" at 34.668,20.069 h0.45 r90
  text "PB14" at 37.081,20.069 h0.45 r90
  text "PB13" at 39.621,20.069 h0.45 r90
  text "PB6" at 9.141,19.942 h0.45 r90
  text "PB5" at 11.808,19.942 h0.45 r90
  text "PB4" at 14.348,19.942 h0.45 r90
  text "PB3" at 16.888,19.942 h0.45 r90
  text "GND" at 1.902,19.815 h0.45 r90
  text "PB11" at 24.254,19.815 h0.45 r90
  text "PB9" at 29.461,19.815 h0.45 r90
  text "GND" at 47.241,19.815 h0.45 r90
  text "GND" at 49.654,19.815 h0.45 r90
  text "+3V3" at 4.061,19.688 h0.45 r90
  text "PB15" at 19.428,19.688 h0.45 r90
  text "PB12" at 21.968,19.688 h0.45 r90
  text "PB10" at 26.921,19.688 h0.45 r90
  text "+3V3" at 44.828,19.561 h0.45 r90
  text "PB12" at 42.288,19.434 h0.45 r90
  text "BOOT0" at 46.507,6.375 h0.56
  text "BOOT1" at 46.632,4.976 h0.5
  text "PB1" at 37.589,2.035 h0.45 r90
  text "GND" at 2.156,1.908 h0.45 r90
  text "PB8" at 4.315,1.908 h0.45 r90
  text "PB9" at 6.855,1.908 h0.45 r90
  text "PC13" at 9.522,1.908 h0.45 r90
  text "PA0" at 14.729,1.908 h0.45 r90
  text "PA1" at 17.142,1.908 h0.45 r90
  text "PA2" at 19.682,1.908 h0.45 r90
  text "PA3" at 22.222,1.908 h0.45 r90
  text "PA4" at 24.762,1.908 h0.45 r90
  text "PA5" at 27.302,1.908 h0.45 r90
  text "PA6" at 29.842,1.908 h0.45 r90
  text "PA7" at 32.382,1.908 h0.45 r90
  text "PB0" at 34.922,1.908 h0.45 r90
  text "PB10" at 40.129,1.908 h0.45 r90
  text "PB11" at 42.542,1.908 h0.45 r90
  text "GND" at 47.876,1.908 h0.45 r90
  text "GND" at 50.416,1.908 h0.45 r90
  text "NRST" at 12.189,1.781 h0.45 r90
  text "+3V3" at 45.082,1.781 h0.45 r90

## Text inside footprints (layer, text, board x,y; h text height)
LED1: Top Overlay "K" at 5.334,9.398 h0.56 r270; Top Overlay "A" at 5.461,4.318 h0.51 r270
LED2: Top Overlay "K" at 5.969,12.954 h0.56 r90; Top Overlay "A" at 5.207,16.891 h0.51 r90